# Altium PCB PCB2.PcbDoc (part 6 of 7)
Units mm, origin at the board's own origin, x right, y up, seen from the top; angles counter-clockwise.
Board outline 49 x 45 mm, 6 copper layers (Component Side, GND1, 3.3V, 1.2V, GND2, Solder Side), stack 1.629 mm thick; 56 components, 116 nets, 925 pads, 478 vias.
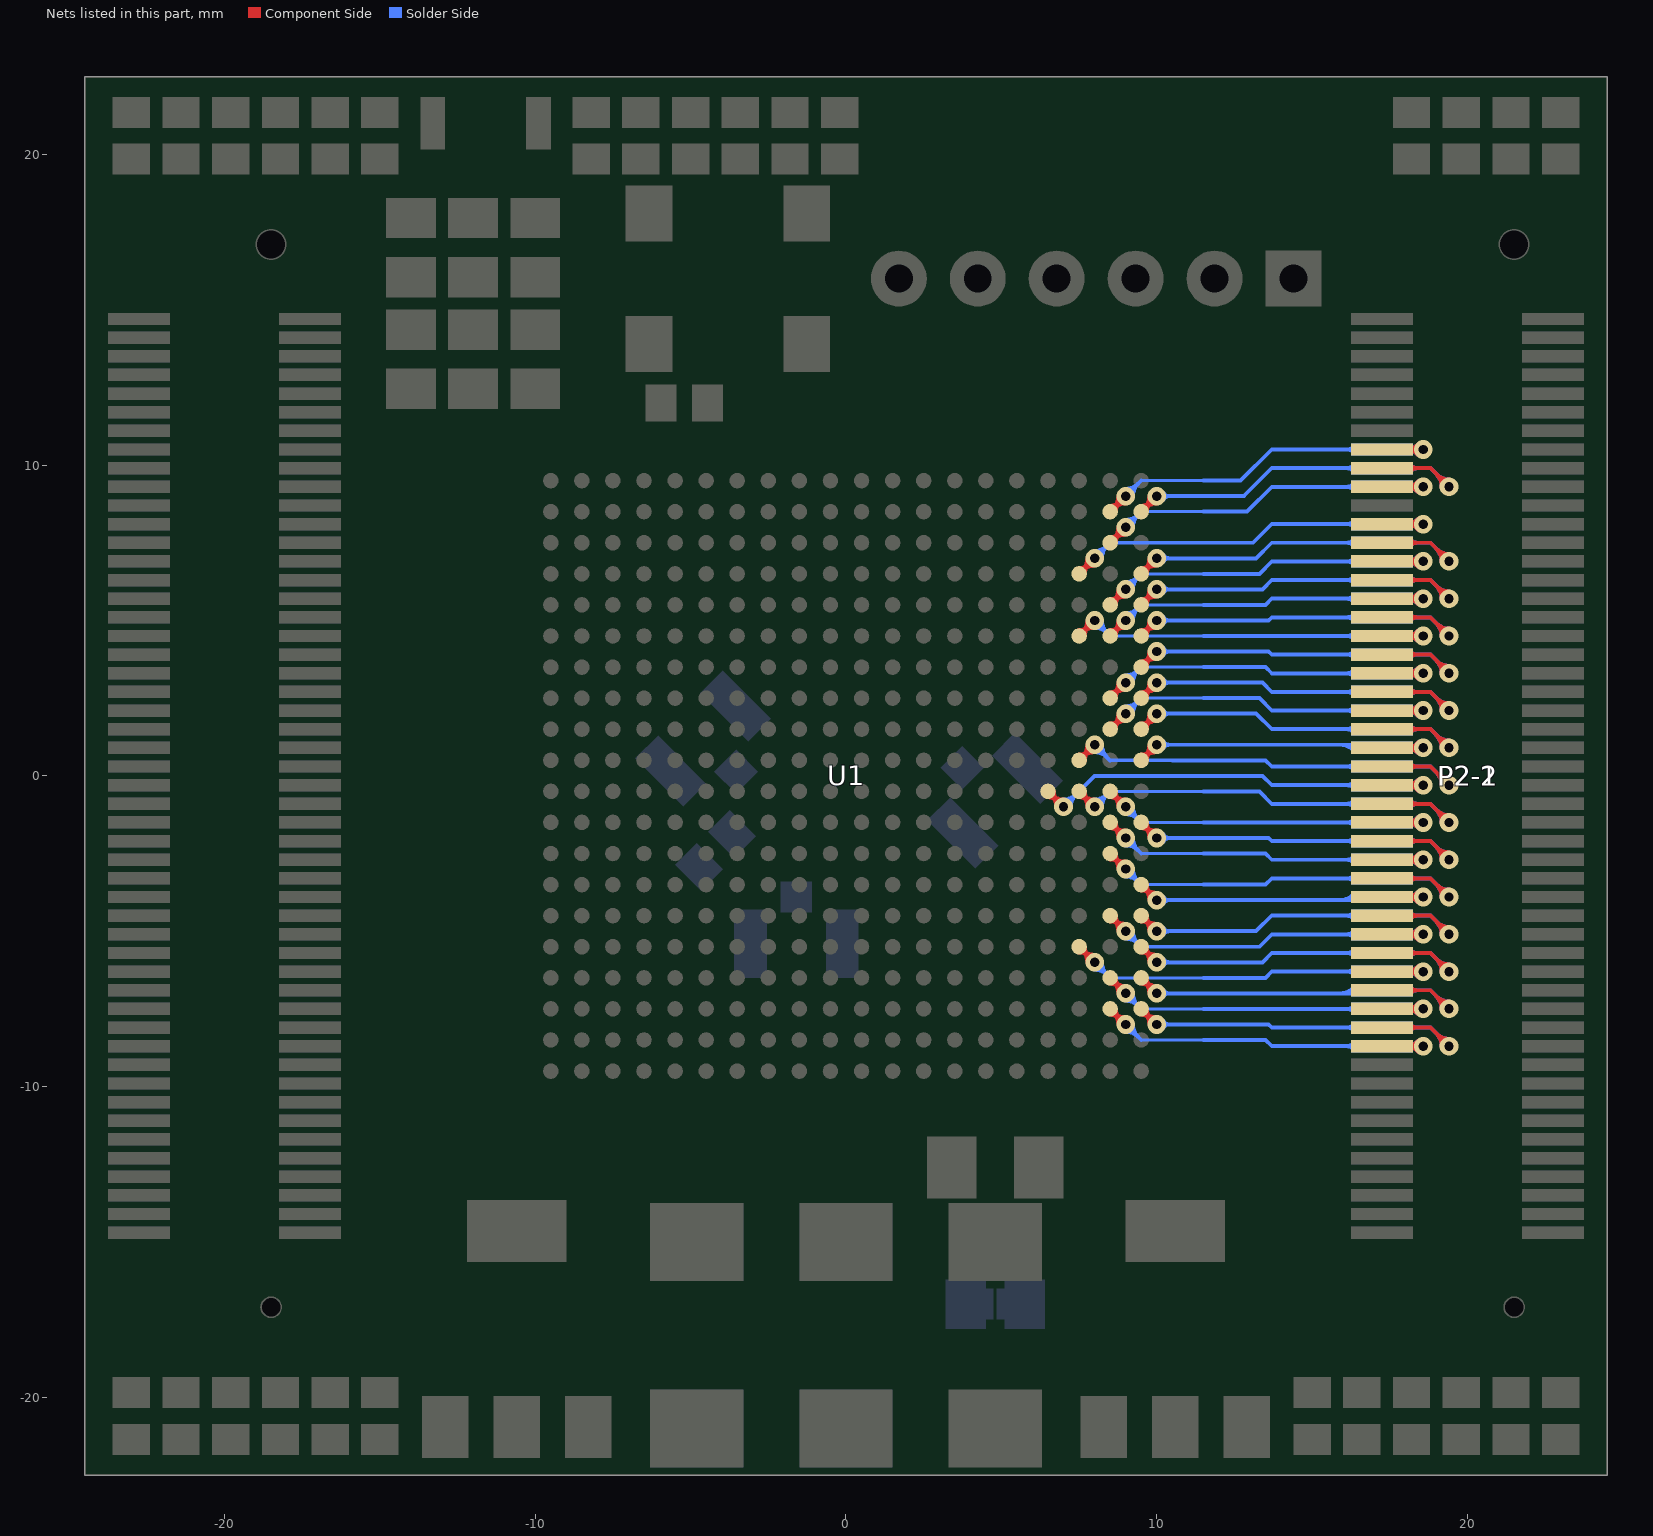
[diagram p10: the nets of this part, all layers, seen from the top]

## Via types
v1: diameter 0.6, hole 0.3, Component Side to Solder Side, tented both sides, 462 vias
v2: diameter 1.5, hole 0.8, Component Side to Solder Side, 10 vias
v3: diameter 1.2, hole 0.6, Component Side to Solder Side, 6 vias

## Nets (pads, with @x,y where several pads share a name; then routed paths per layer and width w, separated by ;. In a path a pad name is that pad's centre, name@x,y a point inside that pad or via, vN(x,y) a via of type N, cw(c..) or ccw(c..) an arc to the next point about the centre after c; other vN are vias at no path point) (continued)
P2-15: P2-1.15 P2-2.15 U1.B19 | length 23.3
  Component Side w0.127: U1.B19@8.5,8.5 v1(9,9) ; P2-1.15@17.25,10.5 v1(18.577,10.5) v1@18.677,10.5 ; U1.B19@8.596,8.596 ccw(c8.193,9) 8.764,9 cw(c8.193,9) U1.B19@8.596,8.596 ; U1.B19@8.596,8.596 cw(c9,8.193) 9,8.764 ccw(c9,8.193) U1.B19@8.596,8.596 ; v1@8.818,8.818 ccw(c9.137,8.5) 8.687,8.5 cw(c9.137,8.5) v1@8.818,8.818 ; v1@8.818,8.818 cw(c8.5,9.137) 8.5,8.686 ccw(c8.5,9.137) v1@8.818,8.818 ; P2-1.15@18.006,10.5 ccw(c18.006,11.071) 18.41,10.667 cw(c18.006,11.071) P2-1.15@18.006,10.5 ; P2-1.15@18.006,10.5 cw(c18.006,9.929) 18.41,10.333 ccw(c18.006,9.929) P2-1.15@18.006,10.5 ; v1@18.38,10.5 ccw(c18.38,10.17) 18.147,10.403 cw(c18.38,10.17) v1@18.38,10.5 ; v1@18.38,10.5 cw(c18.38,10.83) 18.147,10.597 ccw(c18.38,10.83) v1@18.38,10.5
  Solder Side w0.1: 9.5,9.5 10.385,9.5 11.5,9.5
  Solder Side w0.127: v1(9,9) 9.5,9.5 ; 11.5,9.5 12.7,9.5 13.7,10.5 P2-2.15@16.4,10.5 ; P2-2.15@17.25,10.5 v1(18.577,10.5) v1@18.677,10.5 ; 9.404,9.404 ccw(c9.808,9) 9.237,9 cw(c9.808,9) 9.404,9.404 ; 9.404,9.404 cw(c9,9.807) 9,9.237 ccw(c9,9.807) 9.404,9.404 ; 16.12,10.5 ccw(c16.12,10.83) 16.353,10.597 cw(c16.12,10.83) 16.12,10.5 ; 16.12,10.5 cw(c16.12,10.17) 16.353,10.403 ccw(c16.12,10.17) 16.12,10.5 ; P2-2.15@18.006,10.5 ccw(c18.006,11.071) 18.41,10.667 cw(c18.006,11.071) P2-2.15@18.006,10.5 ; P2-2.15@18.006,10.5 cw(c18.006,9.929) 18.41,10.333 ccw(c18.006,9.929) P2-2.15@18.006,10.5 ; v1@18.38,10.5 ccw(c18.38,10.17) 18.147,10.403 cw(c18.38,10.17) v1@18.38,10.5 ; v1@18.38,10.5 cw(c18.38,10.83) 18.147,10.597 ccw(c18.38,10.83) v1@18.38,10.5
P2-17: P2-1.17 P2-2.17 U1.B20 | length 23.9
  Component Side w0.127: U1.B20@9.5,8.5 v1(10,9) ; P2-1.17@17.25,9.9 18.804,9.9 v1(19.404,9.3) ; U1.B20@9.596,8.596 ccw(c9.193,9) 9.764,9 cw(c9.193,9) U1.B20@9.596,8.596 ; U1.B20@9.596,8.596 cw(c10,8.193) 10,8.764 ccw(c10,8.193) U1.B20@9.596,8.596 ; v1@9.818,8.818 ccw(c10.137,8.5) 9.687,8.5 cw(c10.137,8.5) v1@9.818,8.818 ; v1@9.818,8.818 cw(c9.5,9.137) 9.5,8.686 ccw(c9.5,9.137) v1@9.818,8.818 ; 18.38,9.9 ccw(c18.38,9.57) 18.147,9.803 cw(c18.38,9.57) 18.38,9.9 ; 18.38,9.9 cw(c18.38,10.23) 18.147,9.997 ccw(c18.38,10.23) 18.38,9.9 ; 19,9.704 ccw(c19.404,10.107) 19.404,9.536 cw(c19.404,10.107) 19,9.704 ; 19,9.704 cw(c18.597,9.3) 19.168,9.3 ccw(c18.597,9.3) 19,9.704
  Solder Side w0.127: v1(10,9) 10.385,9 ; P2-2.17@17.2,9.9 P2-2.17@17.25,9.9 ; v1(19.404,9.3) 18.804,9.9 P2-2.17@17.25,9.9 ; 10.385,9 ccw(c10.385,8.805) 10.211,8.893 cw(c10.385,8.805) 10.385,9 ; 10.385,9 cw(c10.385,9.195) 10.211,9.107 ccw(c10.385,9.195) 10.385,9 ; 10.385,9 11.5,9 12.8,9 13.7,9.9 P2-2.17@17.25,9.9 ; 16.12,9.9 ccw(c16.12,10.23) 16.353,9.997 cw(c16.12,10.23) 16.12,9.9 ; 16.12,9.9 cw(c16.12,9.57) 16.353,9.803 ccw(c16.12,9.57) 16.12,9.9 ; 18.38,9.9 ccw(c18.38,9.57) 18.147,9.803 cw(c18.38,9.57) 18.38,9.9 ; 18.38,9.9 cw(c18.38,10.23) 18.147,9.997 ccw(c18.38,10.23) 18.38,9.9 ; 19,9.704 ccw(c19.404,10.107) 19.404,9.536 cw(c19.404,10.107) 19,9.704 ; 19,9.704 cw(c18.597,9.3) 19.168,9.3 ccw(c18.597,9.3) 19,9.704
P2-19: P2-1.19 P2-2.19 U1.C19 | length 24
  Component Side w0.127: U1.C19@8.5,7.5 v1(9,8) ; P2-1.19@17.25,9.3 v1(18.577,9.3) v1@18.677,9.3 ; U1.C19@8.596,7.596 ccw(c8.193,8) 8.764,8 cw(c8.193,8) U1.C19@8.596,7.596 ; U1.C19@8.596,7.596 cw(c9,7.193) 9,7.764 ccw(c9,7.193) U1.C19@8.596,7.596 ; v1@8.818,7.818 ccw(c9.137,7.5) 8.687,7.5 cw(c9.137,7.5) v1@8.818,7.818 ; v1@8.818,7.818 cw(c8.5,8.137) 8.5,7.686 ccw(c8.5,8.137) v1@8.818,7.818 ; P2-1.19@18.006,9.3 ccw(c18.006,9.871) 18.41,9.467 cw(c18.006,9.871) P2-1.19@18.006,9.3 ; P2-1.19@18.006,9.3 cw(c18.006,8.729) 18.41,9.133 ccw(c18.006,8.729) P2-1.19@18.006,9.3 ; v1@18.38,9.3 ccw(c18.38,8.97) 18.147,9.203 cw(c18.38,8.97) v1@18.38,9.3 ; v1@18.38,9.3 cw(c18.38,9.63) 18.147,9.397 ccw(c18.38,9.63) v1@18.38,9.3
  Solder Side w0.1: 9.5,8.5 10.385,8.5 11.5,8.5
  Solder Side w0.127: v1(9,8) 9.5,8.5 ; 11.5,8.5 12.9,8.5 13.7,9.3 P2-2.19@17.25,9.3 v1(18.577,9.3) v1@18.677,9.3 ; 9.404,8.404 ccw(c9.808,8) 9.237,8 cw(c9.808,8) 9.404,8.404 ; 9.404,8.404 cw(c9,8.807) 9,8.237 ccw(c9,8.807) 9.404,8.404 ; 16.12,9.3 ccw(c16.12,9.63) 16.353,9.397 cw(c16.12,9.63) 16.12,9.3 ; 16.12,9.3 cw(c16.12,8.97) 16.353,9.203 ccw(c16.12,8.97) 16.12,9.3 ; P2-2.19@18.006,9.3 ccw(c18.006,9.871) 18.41,9.467 cw(c18.006,9.871) P2-2.19@18.006,9.3 ; P2-2.19@18.006,9.3 cw(c18.006,8.729) 18.41,9.133 ccw(c18.006,8.729) P2-2.19@18.006,9.3 ; v1@18.38,9.3 ccw(c18.38,8.97) 18.147,9.203 cw(c18.38,8.97) v1@18.38,9.3 ; v1@18.38,9.3 cw(c18.38,9.63) 18.147,9.397 ccw(c18.38,9.63) v1@18.38,9.3
P2-23: P2-1.23 P2-2.23 U1.D18 | length 25
  Component Side w0.127: U1.D18@7.5,6.5 v1(8,7) ; P2-1.23@17.25,8.1 v1(18.577,8.1) v1@18.677,8.1 ; U1.D18@7.596,6.596 ccw(c7.193,7) 7.764,7 cw(c7.193,7) U1.D18@7.596,6.596 ; U1.D18@7.596,6.596 cw(c8,6.193) 8,6.764 ccw(c8,6.193) U1.D18@7.596,6.596 ; v1@7.818,6.818 ccw(c8.137,6.5) 7.687,6.5 cw(c8.137,6.5) v1@7.818,6.818 ; v1@7.818,6.818 cw(c7.5,7.137) 7.5,6.686 ccw(c7.5,7.137) v1@7.818,6.818 ; P2-1.23@18.006,8.1 ccw(c18.006,8.671) 18.41,8.267 cw(c18.006,8.671) P2-1.23@18.006,8.1 ; P2-1.23@18.006,8.1 cw(c18.006,7.529) 18.41,7.933 ccw(c18.006,7.529) P2-1.23@18.006,8.1 ; v1@18.38,8.1 ccw(c18.38,7.77) 18.147,8.003 cw(c18.38,7.77) v1@18.38,8.1 ; v1@18.38,8.1 cw(c18.38,8.43) 18.147,8.197 ccw(c18.38,8.43) v1@18.38,8.1
  Solder Side w0.1: 8.5,7.5 10.385,7.5 11.5,7.5
  Solder Side w0.127: v1(8,7) 8.5,7.5 ; 11.5,7.5 13.1,7.5 13.7,8.1 P2-2.23@17.25,8.1 v1(18.577,8.1) v1@18.677,8.1 ; 8.404,7.404 ccw(c8.808,7) 8.237,7 cw(c8.808,7) 8.404,7.404 ; 8.404,7.404 cw(c8,7.807) 8,7.237 ccw(c8,7.807) 8.404,7.404 ; 16.12,8.1 ccw(c16.12,8.43) 16.353,8.197 cw(c16.12,8.43) 16.12,8.1 ; 16.12,8.1 cw(c16.12,7.77) 16.353,8.003 ccw(c16.12,7.77) 16.12,8.1 ; P2-2.23@18.006,8.1 ccw(c18.006,8.671) 18.41,8.267 cw(c18.006,8.671) P2-2.23@18.006,8.1 ; P2-2.23@18.006,8.1 cw(c18.006,7.529) 18.41,7.933 ccw(c18.006,7.529) P2-2.23@18.006,8.1 ; v1@18.38,8.1 ccw(c18.38,7.77) 18.147,8.003 cw(c18.38,7.77) v1@18.38,8.1 ; v1@18.38,8.1 cw(c18.38,8.43) 18.147,8.197 ccw(c18.38,8.43) v1@18.38,8.1
P2-25: P2-1.25 P2-2.25 U1.D20 | length 23.8
  Component Side w0.127: U1.D20@9.5,6.5 v1(10,7) ; P2-1.25@17.25,7.5 18.804,7.5 v1(19.404,6.9) ; U1.D20@9.596,6.596 ccw(c9.193,7) 9.764,7 cw(c9.193,7) U1.D20@9.596,6.596 ; U1.D20@9.596,6.596 cw(c10,6.193) 10,6.764 ccw(c10,6.193) U1.D20@9.596,6.596 ; v1@9.818,6.818 ccw(c10.137,6.5) 9.687,6.5 cw(c10.137,6.5) v1@9.818,6.818 ; v1@9.818,6.818 cw(c9.5,7.137) 9.5,6.686 ccw(c9.5,7.137) v1@9.818,6.818 ; 18.38,7.5 ccw(c18.38,7.17) 18.147,7.403 cw(c18.38,7.17) 18.38,7.5 ; 18.38,7.5 cw(c18.38,7.83) 18.147,7.597 ccw(c18.38,7.83) 18.38,7.5 ; 19,7.304 ccw(c19.404,7.707) 19.404,7.136 cw(c19.404,7.707) 19,7.304 ; 19,7.304 cw(c18.597,6.9) 19.168,6.9 ccw(c18.597,6.9) 19,7.304
  Solder Side w0.127: v1(10,7) 10.385,7 ; P2-2.25@17.2,7.5 P2-2.25@17.25,7.5 ; v1(19.404,6.9) 18.804,7.5 P2-2.25@17.25,7.5 ; 10.385,7 ccw(c10.385,6.805) 10.211,6.893 cw(c10.385,6.805) 10.385,7 ; 10.385,7 cw(c10.385,7.195) 10.211,7.107 ccw(c10.385,7.195) 10.385,7 ; 10.385,7 11.5,7 13.2,7 13.7,7.5 P2-2.25@17.25,7.5 ; 16.12,7.5 ccw(c16.12,7.83) 16.353,7.597 cw(c16.12,7.83) 16.12,7.5 ; 16.12,7.5 cw(c16.12,7.17) 16.353,7.403 ccw(c16.12,7.17) 16.12,7.5 ; 18.38,7.5 ccw(c18.38,7.17) 18.147,7.403 cw(c18.38,7.17) 18.38,7.5 ; 18.38,7.5 cw(c18.38,7.83) 18.147,7.597 ccw(c18.38,7.83) 18.38,7.5 ; 19,7.304 ccw(c19.404,7.707) 19.404,7.136 cw(c19.404,7.707) 19,7.304 ; 19,7.304 cw(c18.597,6.9) 19.168,6.9 ccw(c18.597,6.9) 19,7.304
P2-27: P2-1.27 P2-2.27 U1.E19 | length 23.9
  Component Side w0.127: U1.E19@8.5,5.5 v1(9,6) ; P2-1.27@17.25,6.9 v1(18.577,6.9) v1@18.677,6.9 ; U1.E19@8.596,5.596 ccw(c8.193,6) 8.764,6 cw(c8.193,6) U1.E19@8.596,5.596 ; U1.E19@8.596,5.596 cw(c9,5.193) 9,5.764 ccw(c9,5.193) U1.E19@8.596,5.596 ; v1@8.818,5.818 ccw(c9.137,5.5) 8.687,5.5 cw(c9.137,5.5) v1@8.818,5.818 ; v1@8.818,5.818 cw(c8.5,6.137) 8.5,5.686 ccw(c8.5,6.137) v1@8.818,5.818 ; P2-1.27@18.006,6.9 ccw(c18.006,7.471) 18.41,7.067 cw(c18.006,7.471) P2-1.27@18.006,6.9 ; P2-1.27@18.006,6.9 cw(c18.006,6.329) 18.41,6.733 ccw(c18.006,6.329) P2-1.27@18.006,6.9 ; v1@18.38,6.9 ccw(c18.38,6.57) 18.147,6.803 cw(c18.38,6.57) v1@18.38,6.9 ; v1@18.38,6.9 cw(c18.38,7.23) 18.147,6.997 ccw(c18.38,7.23) v1@18.38,6.9
  Solder Side w0.1: 9.5,6.5 10.385,6.5 11.5,6.5
  Solder Side w0.127: v1(9,6) 9.5,6.5 ; 11.5,6.5 13.3,6.5 13.7,6.9 P2-2.27@17.25,6.9 v1(18.577,6.9) v1@18.677,6.9 ; 9.404,6.404 ccw(c9.808,6) 9.237,6 cw(c9.808,6) 9.404,6.404 ; 9.404,6.404 cw(c9,6.807) 9,6.237 ccw(c9,6.807) 9.404,6.404 ; 16.12,6.9 ccw(c16.12,7.23) 16.353,6.997 cw(c16.12,7.23) 16.12,6.9 ; 16.12,6.9 cw(c16.12,6.57) 16.353,6.803 ccw(c16.12,6.57) 16.12,6.9 ; P2-2.27@18.006,6.9 ccw(c18.006,7.471) 18.41,7.067 cw(c18.006,7.471) P2-2.27@18.006,6.9 ; P2-2.27@18.006,6.9 cw(c18.006,6.329) 18.41,6.733 ccw(c18.006,6.329) P2-2.27@18.006,6.9 ; v1@18.38,6.9 ccw(c18.38,6.57) 18.147,6.803 cw(c18.38,6.57) v1@18.38,6.9 ; v1@18.38,6.9 cw(c18.38,7.23) 18.147,6.997 ccw(c18.38,7.23) v1@18.38,6.9
P2-29: P2-1.29 P2-2.29 U1.E20 | length 23.6
  Component Side w0.127: U1.E20@9.5,5.5 v1(10,6) ; P2-1.29@17.25,6.3 18.804,6.3 v1(19.404,5.7) ; U1.E20@9.596,5.596 ccw(c9.193,6) 9.764,6 cw(c9.193,6) U1.E20@9.596,5.596 ; U1.E20@9.596,5.596 cw(c10,5.193) 10,5.764 ccw(c10,5.193) U1.E20@9.596,5.596 ; v1@9.818,5.818 ccw(c10.137,5.5) 9.687,5.5 cw(c10.137,5.5) v1@9.818,5.818 ; v1@9.818,5.818 cw(c9.5,6.137) 9.5,5.686 ccw(c9.5,6.137) v1@9.818,5.818 ; 18.38,6.3 ccw(c18.38,5.97) 18.147,6.203 cw(c18.38,5.97) 18.38,6.3 ; 18.38,6.3 cw(c18.38,6.63) 18.147,6.397 ccw(c18.38,6.63) 18.38,6.3 ; 19,6.104 ccw(c19.404,6.507) 19.404,5.936 cw(c19.404,6.507) 19,6.104 ; 19,6.104 cw(c18.597,5.7) 19.168,5.7 ccw(c18.597,5.7) 19,6.104
  Solder Side w0.127: v1(10,6) 10.385,6 ; v1(19.404,5.7) 18.804,6.3 P2-2.29@17.25,6.3 13.7,6.3 13.4,6 11.5,6 10.385,6 ; 10.385,6 ccw(c10.385,5.805) 10.211,5.893 cw(c10.385,5.805) 10.385,6 ; 10.385,6 cw(c10.385,6.195) 10.211,6.107 ccw(c10.385,6.195) 10.385,6 ; 16.12,6.3 ccw(c16.12,6.63) 16.353,6.397 cw(c16.12,6.63) 16.12,6.3 ; 16.12,6.3 cw(c16.12,5.97) 16.353,6.203 ccw(c16.12,5.97) 16.12,6.3 ; 18.38,6.3 ccw(c18.38,5.97) 18.147,6.203 cw(c18.38,5.97) 18.38,6.3 ; 18.38,6.3 cw(c18.38,6.63) 18.147,6.397 ccw(c18.38,6.63) 18.38,6.3 ; 19,6.104 ccw(c19.404,6.507) 19.404,5.936 cw(c19.404,6.507) 19,6.104 ; 19,6.104 cw(c18.597,5.7) 19.168,5.7 ccw(c18.597,5.7) 19,6.104
P2-31: P2-1.31 P2-2.31 U1.F19 | length 23.8
  Component Side w0.127: U1.F19@8.5,4.5 v1(9,5) ; P2-1.31@17.25,5.7 v1(18.577,5.7) v1@18.677,5.7 ; U1.F19@8.596,4.596 ccw(c8.193,5) 8.764,5 cw(c8.193,5) U1.F19@8.596,4.596 ; U1.F19@8.596,4.596 cw(c9,4.193) 9,4.764 ccw(c9,4.193) U1.F19@8.596,4.596 ; v1@8.818,4.818 ccw(c9.137,4.5) 8.687,4.5 cw(c9.137,4.5) v1@8.818,4.818 ; v1@8.818,4.818 cw(c8.5,5.137) 8.5,4.686 ccw(c8.5,5.137) v1@8.818,4.818 ; P2-1.31@18.006,5.7 ccw(c18.006,6.271) 18.41,5.867 cw(c18.006,6.271) P2-1.31@18.006,5.7 ; P2-1.31@18.006,5.7 cw(c18.006,5.129) 18.41,5.533 ccw(c18.006,5.129) P2-1.31@18.006,5.7 ; v1@18.38,5.7 ccw(c18.38,5.37) 18.147,5.603 cw(c18.38,5.37) v1@18.38,5.7 ; v1@18.38,5.7 cw(c18.38,6.03) 18.147,5.797 ccw(c18.38,6.03) v1@18.38,5.7
  Solder Side w0.1: 9.5,5.5 10.385,5.5 11.5,5.5
  Solder Side w0.127: v1(9,5) 9.5,5.5 ; 11.5,5.5 13.5,5.5 13.7,5.7 P2-2.31@17.25,5.7 v1(18.577,5.7) v1@18.677,5.7 ; 9.404,5.404 ccw(c9.808,5) 9.237,5 cw(c9.808,5) 9.404,5.404 ; 9.404,5.404 cw(c9,5.807) 9,5.237 ccw(c9,5.807) 9.404,5.404 ; 16.12,5.7 ccw(c16.12,6.03) 16.353,5.797 cw(c16.12,6.03) 16.12,5.7 ; 16.12,5.7 cw(c16.12,5.37) 16.353,5.603 ccw(c16.12,5.37) 16.12,5.7 ; P2-2.31@18.006,5.7 ccw(c18.006,6.271) 18.41,5.867 cw(c18.006,6.271) P2-2.31@18.006,5.7 ; P2-2.31@18.006,5.7 cw(c18.006,5.129) 18.41,5.533 ccw(c18.006,5.129) P2-2.31@18.006,5.7 ; v1@18.38,5.7 ccw(c18.38,5.37) 18.147,5.603 cw(c18.38,5.37) v1@18.38,5.7 ; v1@18.38,5.7 cw(c18.38,6.03) 18.147,5.797 ccw(c18.38,6.03) v1@18.38,5.7
P2-33: P2-1.33 P2-2.33 U1.F20 | length 23.6
  Component Side w0.127: U1.F20@9.5,4.5 v1(10,5) ; P2-1.33@17.25,5.1 18.804,5.1 v1(19.404,4.5) ; U1.F20@9.596,4.596 ccw(c9.193,5) 9.764,5 cw(c9.193,5) U1.F20@9.596,4.596 ; U1.F20@9.596,4.596 cw(c10,4.193) 10,4.764 ccw(c10,4.193) U1.F20@9.596,4.596 ; v1@9.818,4.818 ccw(c10.137,4.5) 9.687,4.5 cw(c10.137,4.5) v1@9.818,4.818 ; v1@9.818,4.818 cw(c9.5,5.137) 9.5,4.686 ccw(c9.5,5.137) v1@9.818,4.818 ; 18.38,5.1 ccw(c18.38,4.77) 18.147,5.003 cw(c18.38,4.77) 18.38,5.1 ; 18.38,5.1 cw(c18.38,5.43) 18.147,5.197 ccw(c18.38,5.43) 18.38,5.1 ; 19,4.904 ccw(c19.404,5.307) 19.404,4.736 cw(c19.404,5.307) 19,4.904 ; 19,4.904 cw(c18.597,4.5) 19.168,4.5 ccw(c18.597,4.5) 19,4.904
  Solder Side w0.127: v1(10,5) 10.385,5 ; v1(19.404,4.5) 18.804,5.1 P2-2.33@17.25,5.1 13.7,5.1 13.6,5 11.5,5 10.385,5 ; 10.385,5 ccw(c10.385,4.805) 10.211,4.893 cw(c10.385,4.805) 10.385,5 ; 10.385,5 cw(c10.385,5.195) 10.211,5.107 ccw(c10.385,5.195) 10.385,5 ; 16.12,5.1 ccw(c16.12,5.43) 16.353,5.197 cw(c16.12,5.43) 16.12,5.1 ; 16.12,5.1 cw(c16.12,4.77) 16.353,5.003 ccw(c16.12,4.77) 16.12,5.1 ; 18.38,5.1 ccw(c18.38,4.77) 18.147,5.003 cw(c18.38,4.77) 18.38,5.1 ; 18.38,5.1 cw(c18.38,5.43) 18.147,5.197 ccw(c18.38,5.43) 18.38,5.1 ; 19,4.904 ccw(c19.404,5.307) 19.404,4.736 cw(c19.404,5.307) 19,4.904 ; 19,4.904 cw(c18.597,4.5) 19.168,4.5 ccw(c18.597,4.5) 19,4.904
P2-35: P2-1.35 P2-2.35 U1.F18 | length 24.7
  Component Side w0.127: U1.F18@7.5,4.5 v1(8,5) ; P2-1.35@17.25,4.5 v1(18.577,4.5) v1@18.677,4.5 ; U1.F18@7.596,4.596 ccw(c7.193,5) 7.764,5 cw(c7.193,5) U1.F18@7.596,4.596 ; U1.F18@7.596,4.596 cw(c8,4.193) 8,4.764 ccw(c8,4.193) U1.F18@7.596,4.596 ; v1@7.818,4.818 ccw(c8.137,4.5) 7.687,4.5 cw(c8.137,4.5) v1@7.818,4.818 ; v1@7.818,4.818 cw(c7.5,5.137) 7.5,4.686 ccw(c7.5,5.137) v1@7.818,4.818 ; P2-1.35@18.006,4.5 ccw(c18.006,5.071) 18.41,4.667 cw(c18.006,5.071) P2-1.35@18.006,4.5 ; P2-1.35@18.006,4.5 cw(c18.006,3.929) 18.41,4.333 ccw(c18.006,3.929) P2-1.35@18.006,4.5 ; v1@18.38,4.5 ccw(c18.38,4.17) 18.147,4.403 cw(c18.38,4.17) v1@18.38,4.5 ; v1@18.38,4.5 cw(c18.38,4.83) 18.147,4.597 ccw(c18.38,4.83) v1@18.38,4.5
  Solder Side w0.1: 8.5,4.5 10.5,4.5 11.5,4.5
  Solder Side w0.127: v1(8,5) 8.5,4.5 ; 11.5,4.5 P2-2.35@17.25,4.5 v1(18.577,4.5) v1@18.677,4.5 ; 8.404,4.596 ccw(c8,4.193) 8,4.764 cw(c8,4.193) 8.404,4.596 ; 8.404,4.596 cw(c8.808,5) 8.237,5 ccw(c8.808,5) 8.404,4.596 ; 16.12,4.5 ccw(c16.12,4.83) 16.353,4.597 cw(c16.12,4.83) 16.12,4.5 ; 16.12,4.5 cw(c16.12,4.17) 16.353,4.403 ccw(c16.12,4.17) 16.12,4.5 ; P2-2.35@18.006,4.5 ccw(c18.006,5.071) 18.41,4.667 cw(c18.006,5.071) P2-2.35@18.006,4.5 ; P2-2.35@18.006,4.5 cw(c18.006,3.929) 18.41,4.333 ccw(c18.006,3.929) P2-2.35@18.006,4.5 ; v1@18.38,4.5 ccw(c18.38,4.17) 18.147,4.403 cw(c18.38,4.17) v1@18.38,4.5 ; v1@18.38,4.5 cw(c18.38,4.83) 18.147,4.597 ccw(c18.38,4.83) v1@18.38,4.5
P2-37: P2-1.37 P2-2.37 U1.G20 | length 23.6
  Component Side w0.127: U1.G20@9.5,3.5 v1(10,4) ; P2-1.37@17.25,3.9 18.804,3.9 v1(19.404,3.3) ; U1.G20@9.596,3.596 ccw(c9.193,4) 9.764,4 cw(c9.193,4) U1.G20@9.596,3.596 ; U1.G20@9.596,3.596 cw(c10,3.193) 10,3.764 ccw(c10,3.193) U1.G20@9.596,3.596 ; v1@9.818,3.818 ccw(c10.137,3.5) 9.687,3.5 cw(c10.137,3.5) v1@9.818,3.818 ; v1@9.818,3.818 cw(c9.5,4.137) 9.5,3.686 ccw(c9.5,4.137) v1@9.818,3.818 ; 18.38,3.9 ccw(c18.38,3.57) 18.147,3.803 cw(c18.38,3.57) 18.38,3.9 ; 18.38,3.9 cw(c18.38,4.23) 18.147,3.997 ccw(c18.38,4.23) 18.38,3.9 ; 19,3.704 ccw(c19.404,4.107) 19.404,3.536 cw(c19.404,4.107) 19,3.704 ; 19,3.704 cw(c18.597,3.3) 19.168,3.3 ccw(c18.597,3.3) 19,3.704
  Solder Side w0.127: v1(10,4) 10.385,4 ; v1(19.404,3.3) 18.804,3.9 P2-2.37@17.25,3.9 13.7,3.9 13.6,4 11.5,4 10.385,4 ; 10.385,4 ccw(c10.385,3.805) 10.211,3.893 cw(c10.385,3.805) 10.385,4 ; 10.385,4 cw(c10.385,4.195) 10.211,4.107 ccw(c10.385,4.195) 10.385,4 ; 16.12,3.9 ccw(c16.12,4.23) 16.353,3.997 cw(c16.12,4.23) 16.12,3.9 ; 16.12,3.9 cw(c16.12,3.57) 16.353,3.803 ccw(c16.12,3.57) 16.12,3.9 ; 18.38,3.9 ccw(c18.38,3.57) 18.147,3.803 cw(c18.38,3.57) 18.38,3.9 ; 18.38,3.9 cw(c18.38,4.23) 18.147,3.997 ccw(c18.38,4.23) 18.38,3.9 ; 19,3.704 ccw(c19.404,4.107) 19.404,3.536 cw(c19.404,4.107) 19,3.704 ; 19,3.704 cw(c18.597,3.3) 19.168,3.3 ccw(c18.597,3.3) 19,3.704
P2-39: P2-1.39 P2-2.39 U1.H19 | length 23.8
  Component Side w0.127: U1.H19@8.5,2.5 v1(9,3) ; P2-1.39@17.25,3.3 v1(18.577,3.3) v1@18.677,3.3 ; U1.H19@8.596,2.596 ccw(c8.193,3) 8.764,3 cw(c8.193,3) U1.H19@8.596,2.596 ; U1.H19@8.596,2.596 cw(c9,2.193) 9,2.764 ccw(c9,2.193) U1.H19@8.596,2.596 ; v1@8.818,2.818 ccw(c9.137,2.5) 8.687,2.5 cw(c9.137,2.5) v1@8.818,2.818 ; v1@8.818,2.818 cw(c8.5,3.137) 8.5,2.686 ccw(c8.5,3.137) v1@8.818,2.818 ; P2-1.39@18.006,3.3 ccw(c18.006,3.871) 18.41,3.467 cw(c18.006,3.871) P2-1.39@18.006,3.3 ; P2-1.39@18.006,3.3 cw(c18.006,2.729) 18.41,3.133 ccw(c18.006,2.729) P2-1.39@18.006,3.3 ; v1@18.38,3.3 ccw(c18.38,2.97) 18.147,3.203 cw(c18.38,2.97) v1@18.38,3.3 ; v1@18.38,3.3 cw(c18.38,3.63) 18.147,3.397 ccw(c18.38,3.63) v1@18.38,3.3
  Solder Side w0.1: 9.5,3.5 10.385,3.5 11.5,3.5
  Solder Side w0.127: v1(9,3) 9.5,3.5 ; 11.5,3.5 13.5,3.5 13.7,3.3 P2-2.39@17.25,3.3 v1(18.577,3.3) v1@18.677,3.3 ; 9.404,3.404 ccw(c9.808,3) 9.237,3 cw(c9.808,3) 9.404,3.404 ; 9.404,3.404 cw(c9,3.807) 9,3.237 ccw(c9,3.807) 9.404,3.404 ; 16.12,3.3 ccw(c16.12,3.63) 16.353,3.397 cw(c16.12,3.63) 16.12,3.3 ; 16.12,3.3 cw(c16.12,2.97) 16.353,3.203 ccw(c16.12,2.97) 16.12,3.3 ; P2-2.39@18.006,3.3 ccw(c18.006,3.871) 18.41,3.467 cw(c18.006,3.871) P2-2.39@18.006,3.3 ; P2-2.39@18.006,3.3 cw(c18.006,2.729) 18.41,3.133 ccw(c18.006,2.729) P2-2.39@18.006,3.3 ; v1@18.38,3.3 ccw(c18.38,2.97) 18.147,3.203 cw(c18.38,2.97) v1@18.38,3.3 ; v1@18.38,3.3 cw(c18.38,3.63) 18.147,3.397 ccw(c18.38,3.63) v1@18.38,3.3
P2-41: P2-1.41 P2-2.41 U1.H20 | length 23.7
  Component Side w0.127: U1.H20@9.5,2.5 v1(10,3) ; P2-1.41@17.25,2.7 18.804,2.7 v1(19.404,2.1) ; U1.H20@9.596,2.596 ccw(c9.193,3) 9.764,3 cw(c9.193,3) U1.H20@9.596,2.596 ; U1.H20@9.596,2.596 cw(c10,2.193) 10,2.764 ccw(c10,2.193) U1.H20@9.596,2.596 ; v1@9.818,2.818 ccw(c10.137,2.5) 9.687,2.5 cw(c10.137,2.5) v1@9.818,2.818 ; v1@9.818,2.818 cw(c9.5,3.137) 9.5,2.686 ccw(c9.5,3.137) v1@9.818,2.818 ; 18.38,2.7 ccw(c18.38,2.37) 18.147,2.603 cw(c18.38,2.37) 18.38,2.7 ; 18.38,2.7 cw(c18.38,3.03) 18.147,2.797 ccw(c18.38,3.03) 18.38,2.7 ; 19,2.504 ccw(c19.404,2.907) 19.404,2.336 cw(c19.404,2.907) 19,2.504 ; 19,2.504 cw(c18.597,2.1) 19.168,2.1 ccw(c18.597,2.1) 19,2.504
  Solder Side w0.127: v1(10,3) 10.385,3 ; P2-2.41@17.2,2.7 P2-2.41@17.25,2.7 ; v1(19.404,2.1) 18.804,2.7 P2-2.41@17.25,2.7 ; 10.385,3 ccw(c10.385,2.805) 10.211,2.893 cw(c10.385,2.805) 10.385,3 ; 10.385,3 cw(c10.385,3.195) 10.211,3.107 ccw(c10.385,3.195) 10.385,3 ; 10.385,3 11.5,3 13.4,3 13.7,2.7 P2-2.41@17.25,2.7 ; 16.12,2.7 ccw(c16.12,3.03) 16.353,2.797 cw(c16.12,3.03) 16.12,2.7 ; 16.12,2.7 cw(c16.12,2.37) 16.353,2.603 ccw(c16.12,2.37) 16.12,2.7 ; 18.38,2.7 ccw(c18.38,2.37) 18.147,2.603 cw(c18.38,2.37) 18.38,2.7 ; 18.38,2.7 cw(c18.38,3.03) 18.147,2.797 ccw(c18.38,3.03) 18.38,2.7 ; 19,2.504 ccw(c19.404,2.907) 19.404,2.336 cw(c19.404,2.907) 19,2.504 ; 19,2.504 cw(c18.597,2.1) 19.168,2.1 ccw(c18.597,2.1) 19,2.504
P2-43: P2-1.43 P2-2.43 U1.J19 | length 23.9
  Component Side w0.127: U1.J19@8.5,1.5 v1(9,2) ; P2-1.43@17.25,2.1 v1(18.577,2.1) v1@18.677,2.1 ; U1.J19@8.596,1.596 ccw(c8.193,2) 8.764,2 cw(c8.193,2) U1.J19@8.596,1.596 ; U1.J19@8.596,1.596 cw(c9,1.193) 9,1.764 ccw(c9,1.193) U1.J19@8.596,1.596 ; v1@8.818,1.818 ccw(c9.137,1.5) 8.687,1.5 cw(c9.137,1.5) v1@8.818,1.818 ; v1@8.818,1.818 cw(c8.5,2.137) 8.5,1.687 ccw(c8.5,2.137) v1@8.818,1.818 ; P2-1.43@18.006,2.1 ccw(c18.006,2.671) 18.41,2.267 cw(c18.006,2.671) P2-1.43@18.006,2.1 ; P2-1.43@18.006,2.1 cw(c18.006,1.529) 18.41,1.933 ccw(c18.006,1.529) P2-1.43@18.006,2.1 ; v1@18.38,2.1 ccw(c18.38,1.77) 18.147,2.003 cw(c18.38,1.77) v1@18.38,2.1 ; v1@18.38,2.1 cw(c18.38,2.43) 18.147,2.197 ccw(c18.38,2.43) v1@18.38,2.1
  Solder Side w0.1: 9.5,2.5 10.385,2.5 11.5,2.5
  Solder Side w0.127: v1(9,2) 9.5,2.5 ; 11.5,2.5 13.3,2.5 13.7,2.1 P2-2.43@17.25,2.1 v1(18.577,2.1) v1@18.677,2.1 ; 9.404,2.404 ccw(c9.808,2) 9.237,2 cw(c9.808,2) 9.404,2.404 ; 9.404,2.404 cw(c9,2.807) 9,2.237 ccw(c9,2.807) 9.404,2.404 ; 16.12,2.1 ccw(c16.12,2.43) 16.353,2.197 cw(c16.12,2.43) 16.12,2.1 ; 16.12,2.1 cw(c16.12,1.77) 16.353,2.003 ccw(c16.12,1.77) 16.12,2.1 ; P2-2.43@18.006,2.1 ccw(c18.006,2.671) 18.41,2.267 cw(c18.006,2.671) P2-2.43@18.006,2.1 ; P2-2.43@18.006,2.1 cw(c18.006,1.529) 18.41,1.933 ccw(c18.006,1.529) P2-2.43@18.006,2.1 ; v1@18.38,2.1 ccw(c18.38,1.77) 18.147,2.003 cw(c18.38,1.77) v1@18.38,2.1 ; v1@18.38,2.1 cw(c18.38,2.43) 18.147,2.197 ccw(c18.38,2.43) v1@18.38,2.1
P2-45: P2-1.45 P2-2.45 U1.J20 | length 23.7
  Component Side w0.127: U1.J20@9.5,1.5 v1(10,2) ; P2-1.45@17.25,1.5 18.804,1.5 v1(19.404,0.9) ; U1.J20@9.596,1.596 ccw(c9.193,2) 9.764,2 cw(c9.193,2) U1.J20@9.596,1.596 ; U1.J20@9.596,1.596 cw(c10,1.193) 10,1.764 ccw(c10,1.193) U1.J20@9.596,1.596 ; v1@9.818,1.818 ccw(c10.137,1.5) 9.687,1.5 cw(c10.137,1.5) v1@9.818,1.818 ; v1@9.818,1.818 cw(c9.5,2.137) 9.5,1.687 ccw(c9.5,2.137) v1@9.818,1.818 ; 18.38,1.5 ccw(c18.38,1.17) 18.147,1.403 cw(c18.38,1.17) 18.38,1.5 ; 18.38,1.5 cw(c18.38,1.83) 18.147,1.597 ccw(c18.38,1.83) 18.38,1.5 ; 19,1.304 ccw(c19.404,1.707) 19.404,1.136 cw(c19.404,1.707) 19,1.304 ; 19,1.304 cw(c18.597,0.9) 19.168,0.9 ccw(c18.597,0.9) 19,1.304
  Solder Side w0.127: v1(10,2) 10.385,2 ; v1(19.404,0.9) 18.804,1.5 P2-2.45@17.25,1.5 13.7,1.5 13.2,2 11.5,2 10.385,2 ; 10.385,2 ccw(c10.385,1.805) 10.211,1.893 cw(c10.385,1.805) 10.385,2 ; 10.385,2 cw(c10.385,2.195) 10.211,2.107 ccw(c10.385,2.195) 10.385,2 ; 16.12,1.5 ccw(c16.12,1.83) 16.353,1.597 cw(c16.12,1.83) 16.12,1.5 ; 16.12,1.5 cw(c16.12,1.17) 16.353,1.403 ccw(c16.12,1.17) 16.12,1.5 ; 18.38,1.5 ccw(c18.38,1.17) 18.147,1.403 cw(c18.38,1.17) 18.38,1.5 ; 18.38,1.5 cw(c18.38,1.83) 18.147,1.597 ccw(c18.38,1.83) 18.38,1.5 ; 19,1.304 ccw(c19.404,1.707) 19.404,1.136 cw(c19.404,1.707) 19,1.304 ; 19,1.304 cw(c18.597,0.9) 19.168,0.9 ccw(c18.597,0.9) 19,1.304
P2-47: P2-1.47 P2-2.47 U1.K20 | length 22.2
  Component Side w0.127: U1.K20@9.5,0.5 v1(10,1) ; P2-1.47@17.25,0.9 v1(18.577,0.9) v1@18.677,0.9 ; U1.K20@9.596,0.596 ccw(c9.193,1) 9.764,1 cw(c9.193,1) U1.K20@9.596,0.596 ; U1.K20@9.596,0.596 cw(c10,0.193) 10,0.764 ccw(c10,0.193) U1.K20@9.596,0.596 ; v1@9.818,0.818 ccw(c10.137,0.5) 9.687,0.5 cw(c10.137,0.5) v1@9.818,0.818 ; v1@9.818,0.818 cw(c9.5,1.137) 9.5,0.687 ccw(c9.5,1.137) v1@9.818,0.818 ; P2-1.47@18.006,0.9 ccw(c18.006,1.471) 18.41,1.067 cw(c18.006,1.471) P2-1.47@18.006,0.9 ; P2-1.47@18.006,0.9 cw(c18.006,0.329) 18.41,0.733 ccw(c18.006,0.329) P2-1.47@18.006,0.9 ; v1@18.38,0.9 ccw(c18.38,0.57) 18.147,0.803 cw(c18.38,0.57) v1@18.38,0.9 ; v1@18.38,0.9 cw(c18.38,1.23) 18.147,0.997 ccw(c18.38,1.23) v1@18.38,0.9
  Solder Side w0.127: v1(10,1) 10.385,1 ; P2-2.47@17.25,0.9 v1(18.577,0.9) v1@18.677,0.9 ; P2-2.47@17.25,1 11.5,1 10.385,1 ; 10.385,1 ccw(c10.385,0.805) 10.211,0.893 cw(c10.385,0.805) 10.385,1 ; 10.385,1 cw(c10.385,1.195) 10.211,1.107 ccw(c10.385,1.195) 10.385,1 ; P2-2.47@18.006,0.9 ccw(c18.006,1.471) 18.41,1.067 cw(c18.006,1.471) P2-2.47@18.006,0.9 ; P2-2.47@18.006,0.9 cw(c18.006,0.329) 18.41,0.733 ccw(c18.006,0.329) P2-2.47@18.006,0.9 ; v1@18.38,0.9 ccw(c18.38,0.57) 18.147,0.803 cw(c18.38,0.57) v1@18.38,0.9 ; v1@18.38,0.9 cw(c18.38,1.23) 18.147,0.997 ccw(c18.38,1.23) v1@18.38,0.9 ; 15.879,1 cw(c15.879,0.329) 16.353,0.803 ccw(c15.879,0.329) 15.879,1 ; 16.186,1 cw(c16.186,0.636) 16.443,0.893 ccw(c16.186,0.636) 16.186,1
P2-49: P2-1.49 P2-2.49 U1.K18 | length 26.8
  Component Side w0.127: U1.K18@7.5,0.5 v1(8,1) ; P2-1.49@17.25,0.3 18.804,0.3 v1(19.404,-0.3) ; U1.K18@7.596,0.596 ccw(c7.193,1) 7.764,1 cw(c7.193,1) U1.K18@7.596,0.596 ; U1.K18@7.596,0.596 cw(c8,0.193) 8,0.764 ccw(c8,0.193) U1.K18@7.596,0.596 ; v1@7.818,0.818 ccw(c8.137,0.5) 7.687,0.5 cw(c8.137,0.5) v1@7.818,0.818 ; v1@7.818,0.818 cw(c7.5,1.137) 7.5,0.687 ccw(c7.5,1.137) v1@7.818,0.818 ; 18.38,0.3 ccw(c18.38,-0.03) 18.147,0.203 cw(c18.38,-0.03) 18.38,0.3 ; 18.38,0.3 cw(c18.38,0.63) 18.147,0.397 ccw(c18.38,0.63) 18.38,0.3 ; 19,0.104 ccw(c19.404,0.507) 19.404,-0.064 cw(c19.404,0.507) 19,0.104 ; 19,0.104 cw(c18.597,-0.3) 19.168,-0.3 ccw(c18.597,-0.3) 19,0.104
  Solder Side w0.1: 8.5,0.5 10.5,0.5
  Solder Side w0.127: v1(8,1) 8.5,0.5 ; 10.5,0.5 11.5,0.5 13.5,0.5 13.7,0.3 P2-2.49@17.25,0.3 ; P2-2.49@17.2,0.3 P2-2.49@17.25,0.3 ; v1(19.404,-0.3) 18.804,0.3 P2-2.49@17.25,0.3 ; 8.404,0.596 ccw(c8,0.193) 8,0.764 cw(c8,0.193) 8.404,0.596 ; 8.404,0.596 cw(c8.808,1) 8.237,1 ccw(c8.808,1) 8.404,0.596 ; 16.12,0.3 ccw(c16.12,0.63) 16.353,0.397 cw(c16.12,0.63) 16.12,0.3 ; 16.12,0.3 cw(c16.12,-0.03) 16.353,0.203 ccw(c16.12,-0.03) 16.12,0.3 ; 18.38,0.3 ccw(c18.38,-0.03) 18.147,0.203 cw(c18.38,-0.03) 18.38,0.3 ; 18.38,0.3 cw(c18.38,0.63) 18.147,0.397 ccw(c18.38,0.63) 18.38,0.3 ; 19,0.104 ccw(c19.404,0.507) 19.404,-0.064 cw(c19.404,0.507) 19,0.104 ; 19,0.104 cw(c18.597,-0.3) 19.168,-0.3 ccw(c18.597,-0.3) 19,0.104
P2-51: P2-1.51 P2-2.51 U1.L17 | length 26
  Component Side w0.127: U1.L17@6.5,-0.5 v1(7,-1) ; P2-1.51@17.25,-0.3 v1(18.577,-0.3) v1@18.677,-0.3 ; U1.L17@6.596,-0.596 ccw(c7,-0.193) 7,-0.764 cw(c7,-0.193) U1.L17@6.596,-0.596 ; U1.L17@6.596,-0.596 cw(c6.193,-1) 6.764,-1 ccw(c6.193,-1) U1.L17@6.596,-0.596 ; v1@6.818,-0.818 ccw(c6.5,-1.137) 6.5,-0.686 cw(c6.5,-1.137) v1@6.818,-0.818 ; v1@6.818,-0.818 cw(c7.137,-0.5) 6.687,-0.5 ccw(c7.137,-0.5) v1@6.818,-0.818 ; P2-1.51@18.006,-0.3 ccw(c18.006,0.271) 18.41,-0.133 cw(c18.006,0.271) P2-1.51@18.006,-0.3 ; P2-1.51@18.006,-0.3 cw(c18.006,-0.871) 18.41,-0.467 ccw(c18.006,-0.871) P2-1.51@18.006,-0.3 ; v1@18.38,-0.3 ccw(c18.38,-0.63) 18.147,-0.397 cw(c18.38,-0.63) v1@18.38,-0.3 ; v1@18.38,-0.3 cw(c18.38,0.03) 18.147,-0.203 ccw(c18.38,0.03) v1@18.38,-0.3
  Solder Side w0.127: v1(7,-1) 8,0 10.5,0 11.5,0 13.4,0 13.7,-0.3 P2-2.51@17.25,-0.3 v1(18.577,-0.3) v1@18.677,-0.3 ; 7.404,-0.596 ccw(c7.808,-1) 7.237,-1 cw(c7.808,-1) 7.404,-0.596 ; 7.404,-0.596 cw(c7,-0.193) 7,-0.764 ccw(c7,-0.193) 7.404,-0.596 ; 16.12,-0.3 ccw(c16.12,0.03) 16.353,-0.203 cw(c16.12,0.03) 16.12,-0.3 ; 16.12,-0.3 cw(c16.12,-0.63) 16.353,-0.397 ccw(c16.12,-0.63) 16.12,-0.3 ; P2-2.51@18.006,-0.3 ccw(c18.006,0.271) 18.41,-0.133 cw(c18.006,0.271) P2-2.51@18.006,-0.3 ; P2-2.51@18.006,-0.3 cw(c18.006,-0.871) 18.41,-0.467 ccw(c18.006,-0.871) P2-2.51@18.006,-0.3 ; v1@18.38,-0.3 ccw(c18.38,-0.63) 18.147,-0.397 cw(c18.38,-0.63) v1@18.38,-0.3 ; v1@18.38,-0.3 cw(c18.38,0.03) 18.147,-0.203 ccw(c18.38,0.03) v1@18.38,-0.3
P2-53: P2-1.53 P2-2.53 U1.L18 | length 26.9
  Component Side w0.127: U1.L18@7.5,-0.5 v1(8,-1) ; P2-1.53@17.25,-0.9 18.804,-0.9 v1(19.404,-1.5) ; U1.L18@7.596,-0.596 ccw(c8,-0.193) 8,-0.764 cw(c8,-0.193) U1.L18@7.596,-0.596 ; U1.L18@7.596,-0.596 cw(c7.193,-1) 7.764,-1 ccw(c7.193,-1) U1.L18@7.596,-0.596 ; v1@7.818,-0.818 ccw(c7.5,-1.137) 7.5,-0.686 cw(c7.5,-1.137) v1@7.818,-0.818 ; v1@7.818,-0.818 cw(c8.137,-0.5) 7.687,-0.5 ccw(c8.137,-0.5) v1@7.818,-0.818 ; 18.38,-0.9 ccw(c18.38,-1.23) 18.147,-0.997 cw(c18.38,-1.23) 18.38,-0.9 ; 18.38,-0.9 cw(c18.38,-0.57) 18.147,-0.803 ccw(c18.38,-0.57) 18.38,-0.9 ; 19,-1.096 ccw(c19.404,-0.693) 19.404,-1.264 cw(c19.404,-0.693) 19,-1.096 ; 19,-1.096 cw(c18.597,-1.5) 19.168,-1.5 ccw(c18.597,-1.5) 19,-1.096
  Solder Side w0.1: 8.5,-0.5 10.385,-0.5 11.5,-0.5
  Solder Side w0.127: v1(8,-1) 8.5,-0.5 ; 11.5,-0.5 13.3,-0.5 13.7,-0.9 P2-2.53@17.25,-0.9 ; P2-2.53@17.2,-0.9 P2-2.53@17.25,-0.9 ; v1(19.404,-1.5) 18.804,-0.9 P2-2.53@17.25,-0.9 ; 8.404,-0.596 ccw(c8.808,-1) 8.237,-1 cw(c8.808,-1) 8.404,-0.596 ; 8.404,-0.596 cw(c8,-0.193) 8,-0.764 ccw(c8,-0.193) 8.404,-0.596 ; 16.12,-0.9 ccw(c16.12,-0.57) 16.353,-0.803 cw(c16.12,-0.57) 16.12,-0.9 ; 16.12,-0.9 cw(c16.12,-1.23) 16.353,-0.997 ccw(c16.12,-1.23) 16.12,-0.9 ; 18.38,-0.9 ccw(c18.38,-1.23) 18.147,-0.997 cw(c18.38,-1.23) 18.38,-0.9 ; 18.38,-0.9 cw(c18.38,-0.57) 18.147,-0.803 ccw(c18.38,-0.57) 18.38,-0.9 ; 19,-1.096 ccw(c19.404,-0.693) 19.404,-1.264 cw(c19.404,-0.693) 19,-1.096 ; 19,-1.096 cw(c18.597,-1.5) 19.168,-1.5 ccw(c18.597,-1.5) 19,-1.096
P2-55: P2-1.55 P2-2.55 U1.L19 | length 23.6
  Component Side w0.127: U1.L19@8.5,-0.5 v1(9,-1) ; P2-1.55@17.25,-1.5 v1(18.577,-1.5) v1@18.677,-1.5 ; U1.L19@8.596,-0.596 ccw(c9,-0.193) 9,-0.764 cw(c9,-0.193) U1.L19@8.596,-0.596 ; U1.L19@8.596,-0.596 cw(c8.193,-1) 8.764,-1 ccw(c8.193,-1) U1.L19@8.596,-0.596 ; v1@8.818,-0.818 ccw(c8.5,-1.137) 8.5,-0.686 cw(c8.5,-1.137) v1@8.818,-0.818 ; v1@8.818,-0.818 cw(c9.137,-0.5) 8.687,-0.5 ccw(c9.137,-0.5) v1@8.818,-0.818 ; P2-1.55@18.006,-1.5 ccw(c18.006,-0.929) 18.41,-1.333 cw(c18.006,-0.929) P2-1.55@18.006,-1.5 ; P2-1.55@18.006,-1.5 cw(c18.006,-2.071) 18.41,-1.667 ccw(c18.006,-2.071) P2-1.55@18.006,-1.5 ; v1@18.38,-1.5 ccw(c18.38,-1.83) 18.147,-1.597 cw(c18.38,-1.83) v1@18.38,-1.5 ; v1@18.38,-1.5 cw(c18.38,-1.17) 18.147,-1.403 ccw(c18.38,-1.17) v1@18.38,-1.5
  Solder Side w0.1: 9.5,-1.5 10.385,-1.5 11.5,-1.5
  Solder Side w0.127: v1(9,-1) 9.5,-1.5 ; 11.5,-1.5 P2-2.55@17.15,-1.5 ; P2-2.55@17.25,-1.5 v1(18.577,-1.5) v1@18.677,-1.5 ; 9.404,-1.404 ccw(c9,-1.807) 9,-1.237 cw(c9,-1.807) 9.404,-1.404 ; 9.404,-1.404 cw(c9.808,-1) 9.237,-1 ccw(c9.808,-1) 9.404,-1.404 ; 16.12,-1.5 ccw(c16.12,-1.17) 16.353,-1.403 cw(c16.12,-1.17) 16.12,-1.5 ; 16.12,-1.5 cw(c16.12,-1.83) 16.353,-1.597 ccw(c16.12,-1.83) 16.12,-1.5 ; P2-2.55@18.006,-1.5 ccw(c18.006,-0.929) 18.41,-1.333 cw(c18.006,-0.929) P2-2.55@18.006,-1.5 ; P2-2.55@18.006,-1.5 cw(c18.006,-2.071) 18.41,-1.667 ccw(c18.006,-2.071) P2-2.55@18.006,-1.5 ; v1@18.38,-1.5 ccw(c18.38,-1.83) 18.147,-1.597 cw(c18.38,-1.83) v1@18.38,-1.5 ; v1@18.38,-1.5 cw(c18.38,-1.17) 18.147,-1.403 ccw(c18.38,-1.17) v1@18.38,-1.5
P2-57: P2-1.57 P2-2.57 U1.M20 | length 23.6
  Component Side w0.127: U1.M20@9.5,-1.5 v1(10,-2) ; P2-1.57@17.25,-2.1 18.804,-2.1 v1(19.404,-2.7) ; U1.M20@9.596,-1.596 ccw(c10,-1.193) 10,-1.764 cw(c10,-1.193) U1.M20@9.596,-1.596 ; U1.M20@9.596,-1.596 cw(c9.193,-2) 9.764,-2 ccw(c9.193,-2) U1.M20@9.596,-1.596 ; v1@9.818,-1.818 ccw(c9.5,-2.137) 9.5,-1.686 cw(c9.5,-2.137) v1@9.818,-1.818 ; v1@9.818,-1.818 cw(c10.137,-1.5) 9.687,-1.5 ccw(c10.137,-1.5) v1@9.818,-1.818 ; 18.38,-2.1 ccw(c18.38,-2.43) 18.147,-2.197 cw(c18.38,-2.43) 18.38,-2.1 ; 18.38,-2.1 cw(c18.38,-1.77) 18.147,-2.003 ccw(c18.38,-1.77) 18.38,-2.1 ; 19,-2.296 ccw(c19.404,-1.893) 19.404,-2.464 cw(c19.404,-1.893) 19,-2.296 ; 19,-2.296 cw(c18.597,-2.7) 19.168,-2.7 ccw(c18.597,-2.7) 19,-2.296
  Solder Side w0.127: v1(10,-2) 10.385,-2 ; v1(19.404,-2.7) 18.804,-2.1 P2-2.57@17.25,-2.1 13.7,-2.1 13.6,-2 11.5,-2 10.385,-2 ; 10.385,-2 ccw(c10.385,-2.195) 10.211,-2.107 cw(c10.385,-2.195) 10.385,-2 ; 10.385,-2 cw(c10.385,-1.805) 10.211,-1.893 ccw(c10.385,-1.805) 10.385,-2 ; 16.12,-2.1 ccw(c16.12,-1.77) 16.353,-2.003 cw(c16.12,-1.77) 16.12,-2.1 ; 16.12,-2.1 cw(c16.12,-2.43) 16.353,-2.197 ccw(c16.12,-2.43) 16.12,-2.1 ; 18.38,-2.1 ccw(c18.38,-2.43) 18.147,-2.197 cw(c18.38,-2.43) 18.38,-2.1 ; 18.38,-2.1 cw(c18.38,-1.77) 18.147,-2.003 ccw(c18.38,-1.77) 18.38,-2.1 ; 19,-2.296 ccw(c19.404,-1.893) 19.404,-2.464 cw(c19.404,-1.893) 19,-2.296 ; 19,-2.296 cw(c18.597,-2.7) 19.168,-2.7 ccw(c18.597,-2.7) 19,-2.296
P2-59: P2-1.59 P2-2.59 U1.M19 | length 23.8
  Component Side w0.127: U1.M19@8.5,-1.5 v1(9,-2) ; P2-1.59@17.25,-2.7 v1(18.577,-2.7) v1@18.677,-2.7 ; U1.M19@8.596,-1.596 ccw(c9,-1.193) 9,-1.764 cw(c9,-1.193) U1.M19@8.596,-1.596 ; U1.M19@8.596,-1.596 cw(c8.193,-2) 8.764,-2 ccw(c8.193,-2) U1.M19@8.596,-1.596 ; v1@8.818,-1.818 ccw(c8.5,-2.137) 8.5,-1.686 cw(c8.5,-2.137) v1@8.818,-1.818 ; v1@8.818,-1.818 cw(c9.137,-1.5) 8.687,-1.5 ccw(c9.137,-1.5) v1@8.818,-1.818 ; P2-1.59@18.006,-2.7 ccw(c18.006,-2.129) 18.41,-2.533 cw(c18.006,-2.129) P2-1.59@18.006,-2.7 ; P2-1.59@18.006,-2.7 cw(c18.006,-3.271) 18.41,-2.867 ccw(c18.006,-3.271) P2-1.59@18.006,-2.7 ; v1@18.38,-2.7 ccw(c18.38,-3.03) 18.147,-2.797 cw(c18.38,-3.03) v1@18.38,-2.7 ; v1@18.38,-2.7 cw(c18.38,-2.37) 18.147,-2.603 ccw(c18.38,-2.37) v1@18.38,-2.7
  Solder Side w0.1: 9.5,-2.5 10.385,-2.5 11.5,-2.5
  Solder Side w0.127: v1(9,-2) 9.5,-2.5 ; 11.5,-2.5 13.5,-2.5 13.7,-2.7 P2-2.59@17.25,-2.7 v1(18.577,-2.7) v1@18.677,-2.7 ; 9.404,-2.404 ccw(c9,-2.807) 9,-2.237 cw(c9,-2.807) 9.404,-2.404 ; 9.404,-2.404 cw(c9.808,-2) 9.237,-2 ccw(c9.808,-2) 9.404,-2.404 ; 16.12,-2.7 ccw(c16.12,-2.37) 16.353,-2.603 cw(c16.12,-2.37) 16.12,-2.7 ; 16.12,-2.7 cw(c16.12,-3.03) 16.353,-2.797 ccw(c16.12,-3.03) 16.12,-2.7 ; P2-2.59@18.006,-2.7 ccw(c18.006,-2.129) 18.41,-2.533 cw(c18.006,-2.129) P2-2.59@18.006,-2.7 ; P2-2.59@18.006,-2.7 cw(c18.006,-3.271) 18.41,-2.867 ccw(c18.006,-3.271) P2-2.59@18.006,-2.7 ; v1@18.38,-2.7 ccw(c18.38,-3.03) 18.147,-2.797 cw(c18.38,-3.03) v1@18.38,-2.7 ; v1@18.38,-2.7 cw(c18.38,-2.37) 18.147,-2.603 ccw(c18.38,-2.37) v1@18.38,-2.7
P2-61: P2-1.61 P2-2.61 U1.N19 | length 25.8
  Component Side w0.127: U1.N19@8.5,-2.5 v1(9,-3) ; P2-1.61@17.25,-3.3 18.804,-3.3 v1(19.404,-3.9) ; U1.N19@8.596,-2.596 ccw(c9,-2.193) 9,-2.764 cw(c9,-2.193) U1.N19@8.596,-2.596 ; U1.N19@8.596,-2.596 cw(c8.193,-3) 8.764,-3 ccw(c8.193,-3) U1.N19@8.596,-2.596 ; v1@8.818,-2.818 ccw(c8.5,-3.137) 8.5,-2.686 cw(c8.5,-3.137) v1@8.818,-2.818 ; v1@8.818,-2.818 cw(c9.137,-2.5) 8.687,-2.5 ccw(c9.137,-2.5) v1@8.818,-2.818 ; 18.38,-3.3 ccw(c18.38,-3.63) 18.147,-3.397 cw(c18.38,-3.63) 18.38,-3.3 ; 18.38,-3.3 cw(c18.38,-2.97) 18.147,-3.203 ccw(c18.38,-2.97) 18.38,-3.3 ; 19,-3.496 ccw(c19.404,-3.093) 19.404,-3.664 cw(c19.404,-3.093) 19,-3.496 ; 19,-3.496 cw(c18.597,-3.9) 19.168,-3.9 ccw(c18.597,-3.9) 19,-3.496
  Solder Side w0.1: 9.5,-3.5 10.385,-3.5 11.5,-3.5
  Solder Side w0.127: v1(9,-3) 9.5,-3.5 ; 11.5,-3.5 13.5,-3.5 13.7,-3.3 P2-2.61@17.25,-3.3 ; P2-2.61@17.2,-3.3 P2-2.61@17.25,-3.3 ; v1(19.404,-3.9) 18.804,-3.3 P2-2.61@17.25,-3.3 ; 9.404,-3.404 ccw(c9,-3.807) 9,-3.237 cw(c9,-3.807) 9.404,-3.404 ; 9.404,-3.404 cw(c9.808,-3) 9.237,-3 ccw(c9.808,-3) 9.404,-3.404 ; 16.12,-3.3 ccw(c16.12,-2.97) 16.353,-3.203 cw(c16.12,-2.97) 16.12,-3.3 ; 16.12,-3.3 cw(c16.12,-3.63) 16.353,-3.397 ccw(c16.12,-3.63) 16.12,-3.3 ; 18.38,-3.3 ccw(c18.38,-3.63) 18.147,-3.397 cw(c18.38,-3.63) 18.38,-3.3 ; 18.38,-3.3 cw(c18.38,-2.97) 18.147,-3.203 ccw(c18.38,-2.97) 18.38,-3.3 ; 19,-3.496 ccw(c19.404,-3.093) 19.404,-3.664 cw(c19.404,-3.093) 19,-3.496 ; 19,-3.496 cw(c18.597,-3.9) 19.168,-3.9 ccw(c18.597,-3.9) 19,-3.496
P2-63: P2-1.63 P2-2.63 U1.P20 | length 22.2
  Component Side w0.127: U1.P20@9.5,-3.5 v1(10,-4) ; P2-1.63@17.25,-3.9 v1(18.577,-3.9) v1@18.677,-3.9 ; U1.P20@9.596,-3.596 ccw(c10,-3.193) 10,-3.764 cw(c10,-3.193) U1.P20@9.596,-3.596 ; U1.P20@9.596,-3.596 cw(c9.193,-4) 9.764,-4 ccw(c9.193,-4) U1.P20@9.596,-3.596 ; v1@9.818,-3.818 ccw(c9.5,-4.137) 9.5,-3.686 cw(c9.5,-4.137) v1@9.818,-3.818 ; v1@9.818,-3.818 cw(c10.137,-3.5) 9.687,-3.5 ccw(c10.137,-3.5) v1@9.818,-3.818 ; P2-1.63@18.006,-3.9 ccw(c18.006,-3.329) 18.41,-3.733 cw(c18.006,-3.329) P2-1.63@18.006,-3.9 ; P2-1.63@18.006,-3.9 cw(c18.006,-4.471) 18.41,-4.067 ccw(c18.006,-4.471) P2-1.63@18.006,-3.9 ; v1@18.38,-3.9 ccw(c18.38,-4.23) 18.147,-3.997 cw(c18.38,-4.23) v1@18.38,-3.9 ; v1@18.38,-3.9 cw(c18.38,-3.57) 18.147,-3.803 ccw(c18.38,-3.57) v1@18.38,-3.9
  Solder Side w0.127: v1(10,-4) 10.385,-4 ; P2-2.63@17.25,-4 11.5,-4 10.385,-4 ; P2-2.63@17.25,-3.9 v1(18.577,-3.9) v1@18.677,-3.9 ; 10.385,-4 ccw(c10.385,-4.195) 10.211,-4.107 cw(c10.385,-4.195) 10.385,-4 ; 10.385,-4 cw(c10.385,-3.805) 10.211,-3.893 ccw(c10.385,-3.805) 10.385,-4 ; P2-2.63@18.006,-3.9 ccw(c18.006,-3.329) 18.41,-3.733 cw(c18.006,-3.329) P2-2.63@18.006,-3.9 ; P2-2.63@18.006,-3.9 cw(c18.006,-4.471) 18.41,-4.067 ccw(c18.006,-4.471) P2-2.63@18.006,-3.9 ; v1@18.38,-3.9 ccw(c18.38,-4.23) 18.147,-3.997 cw(c18.38,-4.23) v1@18.38,-3.9 ; v1@18.38,-3.9 cw(c18.38,-3.57) 18.147,-3.803 ccw(c18.38,-3.57) v1@18.38,-3.9 ; 15.879,-4 ccw(c15.879,-3.329) 16.353,-3.803 cw(c15.879,-3.329) 15.879,-4 ; 16.186,-4 ccw(c16.186,-3.636) 16.443,-3.893 cw(c16.186,-3.636) 16.186,-4
P2-65: P2-1.65 P2-2.65 U1.R20 | length 23.7
  Component Side w0.127: U1.R20@9.5,-4.5 v1(10,-5) ; P2-1.65@17.25,-4.5 18.804,-4.5 v1(19.404,-5.1) ; U1.R20@9.596,-4.596 ccw(c10,-4.193) 10,-4.764 cw(c10,-4.193) U1.R20@9.596,-4.596 ; U1.R20@9.596,-4.596 cw(c9.193,-5) 9.764,-5 ccw(c9.193,-5) U1.R20@9.596,-4.596 ; v1@9.818,-4.818 ccw(c9.5,-5.137) 9.5,-4.686 cw(c9.5,-5.137) v1@9.818,-4.818 ; v1@9.818,-4.818 cw(c10.137,-4.5) 9.687,-4.5 ccw(c10.137,-4.5) v1@9.818,-4.818 ; 18.38,-4.5 ccw(c18.38,-4.83) 18.147,-4.597 cw(c18.38,-4.83) 18.38,-4.5 ; 18.38,-4.5 cw(c18.38,-4.17) 18.147,-4.403 ccw(c18.38,-4.17) 18.38,-4.5 ; 19,-4.696 ccw(c19.404,-4.293) 19.404,-4.864 cw(c19.404,-4.293) 19,-4.696 ; 19,-4.696 cw(c18.597,-5.1) 19.168,-5.1 ccw(c18.597,-5.1) 19,-4.696
  Solder Side w0.127: v1(10,-5) 10.385,-5 ; v1(19.404,-5.1) 18.804,-4.5 P2-2.65@17.25,-4.5 13.7,-4.5 13.2,-5 11.5,-5 10.385,-5 ; 10.385,-5 ccw(c10.385,-5.195) 10.211,-5.107 cw(c10.385,-5.195) 10.385,-5 ; 10.385,-5 cw(c10.385,-4.805) 10.211,-4.893 ccw(c10.385,-4.805) 10.385,-5 ; 16.12,-4.5 ccw(c16.12,-4.17) 16.353,-4.403 cw(c16.12,-4.17) 16.12,-4.5 ; 16.12,-4.5 cw(c16.12,-4.83) 16.353,-4.597 ccw(c16.12,-4.83) 16.12,-4.5 ; 18.38,-4.5 ccw(c18.38,-4.83) 18.147,-4.597 cw(c18.38,-4.83) 18.38,-4.5 ; 18.38,-4.5 cw(c18.38,-4.17) 18.147,-4.403 ccw(c18.38,-4.17) 18.38,-4.5 ; 19,-4.696 ccw(c19.404,-4.293) 19.404,-4.864 cw(c19.404,-4.293) 19,-4.696 ; 19,-4.696 cw(c18.597,-5.1) 19.168,-5.1 ccw(c18.597,-5.1) 19,-4.696
P2-67: P2-1.67 P2-2.67 U1.R19 | length 23.9
  Component Side w0.127: U1.R19@8.5,-4.5 v1(9,-5) ; P2-1.67@17.25,-5.1 v1(18.577,-5.1) v1@18.677,-5.1 ; U1.R19@8.596,-4.596 ccw(c9,-4.193) 9,-4.764 cw(c9,-4.193) U1.R19@8.596,-4.596 ; U1.R19@8.596,-4.596 cw(c8.193,-5) 8.764,-5 ccw(c8.193,-5) U1.R19@8.596,-4.596 ; v1@8.818,-4.818 ccw(c8.5,-5.137) 8.5,-4.686 cw(c8.5,-5.137) v1@8.818,-4.818 ; v1@8.818,-4.818 cw(c9.137,-4.5) 8.687,-4.5 ccw(c9.137,-4.5) v1@8.818,-4.818 ; P2-1.67@18.006,-5.1 ccw(c18.006,-4.529) 18.41,-4.933 cw(c18.006,-4.529) P2-1.67@18.006,-5.1 ; P2-1.67@18.006,-5.1 cw(c18.006,-5.671) 18.41,-5.267 ccw(c18.006,-5.671) P2-1.67@18.006,-5.1 ; v1@18.38,-5.1 ccw(c18.38,-5.43) 18.147,-5.197 cw(c18.38,-5.43) v1@18.38,-5.1 ; v1@18.38,-5.1 cw(c18.38,-4.77) 18.147,-5.003 ccw(c18.38,-4.77) v1@18.38,-5.1
  Solder Side w0.1: 9.5,-5.5 10.385,-5.5 11.5,-5.5
  Solder Side w0.127: v1(9,-5) 9.5,-5.5 ; 11.5,-5.5 13.3,-5.5 13.7,-5.1 P2-2.67@17.25,-5.1 v1(18.577,-5.1) v1@18.677,-5.1 ; 9.404,-5.404 ccw(c9,-5.807) 9,-5.237 cw(c9,-5.807) 9.404,-5.404 ; 9.404,-5.404 cw(c9.808,-5) 9.237,-5 ccw(c9.808,-5) 9.404,-5.404 ; 16.12,-5.1 ccw(c16.12,-4.77) 16.353,-5.003 cw(c16.12,-4.77) 16.12,-5.1 ; 16.12,-5.1 cw(c16.12,-5.43) 16.353,-5.197 ccw(c16.12,-5.43) 16.12,-5.1 ; P2-2.67@18.006,-5.1 ccw(c18.006,-4.529) 18.41,-4.933 cw(c18.006,-4.529) P2-2.67@18.006,-5.1 ; P2-2.67@18.006,-5.1 cw(c18.006,-5.671) 18.41,-5.267 ccw(c18.006,-5.671) P2-2.67@18.006,-5.1 ; v1@18.38,-5.1 ccw(c18.38,-5.43) 18.147,-5.197 cw(c18.38,-5.43) v1@18.38,-5.1 ; v1@18.38,-5.1 cw(c18.38,-4.77) 18.147,-5.003 ccw(c18.38,-4.77) v1@18.38,-5.1
P2-69: P2-1.69 P2-2.69 U1.T20 | length 23.6
  Component Side w0.127: U1.T20@9.5,-5.5 v1(10,-6) ; P2-1.69@17.25,-5.7 18.804,-5.7 v1(19.404,-6.3) ; U1.T20@9.596,-5.596 ccw(c10,-5.193) 10,-5.764 cw(c10,-5.193) U1.T20@9.596,-5.596 ; U1.T20@9.596,-5.596 cw(c9.193,-6) 9.764,-6 ccw(c9.193,-6) U1.T20@9.596,-5.596 ; v1@9.818,-5.818 ccw(c9.5,-6.137) 9.5,-5.686 cw(c9.5,-6.137) v1@9.818,-5.818 ; v1@9.818,-5.818 cw(c10.137,-5.5) 9.687,-5.5 ccw(c10.137,-5.5) v1@9.818,-5.818 ; 18.38,-5.7 ccw(c18.38,-6.03) 18.147,-5.797 cw(c18.38,-6.03) 18.38,-5.7 ; 18.38,-5.7 cw(c18.38,-5.37) 18.147,-5.603 ccw(c18.38,-5.37) 18.38,-5.7 ; 19,-5.896 ccw(c19.404,-5.493) 19.404,-6.064 cw(c19.404,-5.493) 19,-5.896 ; 19,-5.896 cw(c18.597,-6.3) 19.168,-6.3 ccw(c18.597,-6.3) 19,-5.896
  Solder Side w0.127: v1(10,-6) 10.385,-6 ; v1(19.404,-6.3) 18.804,-5.7 P2-2.69@17.25,-5.7 13.7,-5.7 13.4,-6 11.5,-6 10.385,-6 ; 10.385,-6 ccw(c10.385,-6.195) 10.211,-6.107 cw(c10.385,-6.195) 10.385,-6 ; 10.385,-6 cw(c10.385,-5.805) 10.211,-5.893 ccw(c10.385,-5.805) 10.385,-6 ; 16.12,-5.7 ccw(c16.12,-5.37) 16.353,-5.603 cw(c16.12,-5.37) 16.12,-5.7 ; 16.12,-5.7 cw(c16.12,-6.03) 16.353,-5.797 ccw(c16.12,-6.03) 16.12,-5.7 ; 18.38,-5.7 ccw(c18.38,-6.03) 18.147,-5.797 cw(c18.38,-6.03) 18.38,-5.7 ; 18.38,-5.7 cw(c18.38,-5.37) 18.147,-5.603 ccw(c18.38,-5.37) 18.38,-5.7 ; 19,-5.896 ccw(c19.404,-5.493) 19.404,-6.064 cw(c19.404,-5.493) 19,-5.896 ; 19,-5.896 cw(c18.597,-6.3) 19.168,-6.3 ccw(c18.597,-6.3) 19,-5.896
P2-71: P2-1.71 P2-2.71 U1.T18 | length 24.8
  Component Side w0.127: U1.T18@7.5,-5.5 v1(8,-6) ; P2-1.71@17.25,-6.3 v1(18.577,-6.3) v1@18.677,-6.3 ; U1.T18@7.596,-5.596 ccw(c8,-5.193) 8,-5.764 cw(c8,-5.193) U1.T18@7.596,-5.596 ; U1.T18@7.596,-5.596 cw(c7.193,-6) 7.764,-6 ccw(c7.193,-6) U1.T18@7.596,-5.596 ; v1@7.818,-5.818 ccw(c7.5,-6.137) 7.5,-5.686 cw(c7.5,-6.137) v1@7.818,-5.818 ; v1@7.818,-5.818 cw(c8.137,-5.5) 7.687,-5.5 ccw(c8.137,-5.5) v1@7.818,-5.818 ; P2-1.71@18.006,-6.3 ccw(c18.006,-5.729) 18.41,-6.133 cw(c18.006,-5.729) P2-1.71@18.006,-6.3 ; P2-1.71@18.006,-6.3 cw(c18.006,-6.871) 18.41,-6.467 ccw(c18.006,-6.871) P2-1.71@18.006,-6.3 ; v1@18.38,-6.3 ccw(c18.38,-6.63) 18.147,-6.397 cw(c18.38,-6.63) v1@18.38,-6.3 ; v1@18.38,-6.3 cw(c18.38,-5.97) 18.147,-6.203 ccw(c18.38,-5.97) v1@18.38,-6.3
  Solder Side w0.1: 8.5,-6.5 10.385,-6.5 11.5,-6.5
  Solder Side w0.127: v1(8,-6) 8.5,-6.5 ; 11.5,-6.5 13.5,-6.5 13.7,-6.3 P2-2.71@17.25,-6.3 v1(18.577,-6.3) v1@18.677,-6.3 ; 8.404,-6.404 ccw(c8,-6.807) 8,-6.237 cw(c8,-6.807) 8.404,-6.404 ; 8.404,-6.404 cw(c8.808,-6) 8.237,-6 ccw(c8.808,-6) 8.404,-6.404 ; 16.12,-6.3 ccw(c16.12,-5.97) 16.353,-6.203 cw(c16.12,-5.97) 16.12,-6.3 ; 16.12,-6.3 cw(c16.12,-6.63) 16.353,-6.397 ccw(c16.12,-6.63) 16.12,-6.3 ; P2-2.71@18.006,-6.3 ccw(c18.006,-5.729) 18.41,-6.133 cw(c18.006,-5.729) P2-2.71@18.006,-6.3 ; P2-2.71@18.006,-6.3 cw(c18.006,-6.871) 18.41,-6.467 ccw(c18.006,-6.871) P2-2.71@18.006,-6.3 ; v1@18.38,-6.3 ccw(c18.38,-6.63) 18.147,-6.397 cw(c18.38,-6.63) v1@18.38,-6.3 ; v1@18.38,-6.3 cw(c18.38,-5.97) 18.147,-6.203 ccw(c18.38,-5.97) v1@18.38,-6.3
P2-73: P2-1.73 P2-2.73 U1.U20 | length 24.2
  Component Side w0.127: U1.U20@9.5,-6.5 v1(10,-7) ; P2-1.73@17.25,-6.9 18.804,-6.9 v1(19.404,-7.5) ; U1.U20@9.596,-6.596 ccw(c10,-6.193) 10,-6.764 cw(c10,-6.193) U1.U20@9.596,-6.596 ; U1.U20@9.596,-6.596 cw(c9.193,-7) 9.764,-7 ccw(c9.193,-7) U1.U20@9.596,-6.596 ; v1@9.818,-6.818 ccw(c9.5,-7.137) 9.5,-6.686 cw(c9.5,-7.137) v1@9.818,-6.818 ; v1@9.818,-6.818 cw(c10.137,-6.5) 9.687,-6.5 ccw(c10.137,-6.5) v1@9.818,-6.818 ; 18.38,-6.9 ccw(c18.38,-7.23) 18.147,-6.997 cw(c18.38,-7.23) 18.38,-6.9 ; 18.38,-6.9 cw(c18.38,-6.57) 18.147,-6.803 ccw(c18.38,-6.57) 18.38,-6.9 ; 19,-7.096 ccw(c19.404,-6.693) 19.404,-7.264 cw(c19.404,-6.693) 19,-7.096 ; 19,-7.096 cw(c18.597,-7.5) 19.168,-7.5 ccw(c18.597,-7.5) 19,-7.096
  Solder Side w0.127: v1(10,-7) 10.385,-7 ; P2-2.73@17.2,-6.9 P2-2.73@17.25,-6.9 18.804,-6.9 v1(19.404,-7.5) ; P2-2.73@17.25,-7 11.5,-7 10.385,-7 ; 10.385,-7 ccw(c10.385,-7.195) 10.211,-7.107 cw(c10.385,-7.195) 10.385,-7 ; 10.385,-7 cw(c10.385,-6.805) 10.211,-6.893 ccw(c10.385,-6.805) 10.385,-7 ; 18.38,-6.9 ccw(c18.38,-7.23) 18.147,-6.997 cw(c18.38,-7.23) 18.38,-6.9 ; 18.38,-6.9 cw(c18.38,-6.57) 18.147,-6.803 ccw(c18.38,-6.57) 18.38,-6.9 ; 19,-7.096 ccw(c19.404,-6.693) 19.404,-7.264 cw(c19.404,-6.693) 19,-7.096 ; 19,-7.096 cw(c18.597,-7.5) 19.168,-7.5 ccw(c18.597,-7.5) 19,-7.096 ; 15.879,-7 ccw(c15.879,-6.329) 16.353,-6.803 cw(c15.879,-6.329) 15.879,-7 ; 16.186,-7 ccw(c16.186,-6.636) 16.443,-6.893 cw(c16.186,-6.636) 16.186,-7
P2-75: P2-1.75 P2-2.75 U1.U19 | length 23.7
  Component Side w0.127: U1.U19@8.5,-6.5 v1(9,-7) ; P2-1.75@17.25,-7.5 v1(18.577,-7.5) v1@18.677,-7.5 ; U1.U19@8.596,-6.596 ccw(c9,-6.193) 9,-6.764 cw(c9,-6.193) U1.U19@8.596,-6.596 ; U1.U19@8.596,-6.596 cw(c8.193,-7) 8.764,-7 ccw(c8.193,-7) U1.U19@8.596,-6.596 ; v1@8.818,-6.818 ccw(c8.5,-7.137) 8.5,-6.686 cw(c8.5,-7.137) v1@8.818,-6.818 ; v1@8.818,-6.818 cw(c9.137,-6.5) 8.687,-6.5 ccw(c9.137,-6.5) v1@8.818,-6.818 ; P2-1.75@18.006,-7.5 ccw(c18.006,-6.929) 18.41,-7.333 cw(c18.006,-6.929) P2-1.75@18.006,-7.5 ; P2-1.75@18.006,-7.5 cw(c18.006,-8.071) 18.41,-7.667 ccw(c18.006,-8.071) P2-1.75@18.006,-7.5 ; v1@18.38,-7.5 ccw(c18.38,-7.83) 18.147,-7.597 cw(c18.38,-7.83) v1@18.38,-7.5 ; v1@18.38,-7.5 cw(c18.38,-7.17) 18.147,-7.403 ccw(c18.38,-7.17) v1@18.38,-7.5
  Solder Side w0.1: 9.5,-7.5 10.385,-7.5 11.5,-7.5
  Solder Side w0.127: v1(9,-7) 9.5,-7.5 ; 11.5,-7.5 P2-2.75@17.25,-7.5 v1(18.577,-7.5) v1@18.677,-7.5 ; 9.404,-7.404 ccw(c9,-7.807) 9,-7.237 cw(c9,-7.807) 9.404,-7.404 ; 9.404,-7.404 cw(c9.808,-7) 9.237,-7 ccw(c9.808,-7) 9.404,-7.404 ; 16.12,-7.5 ccw(c16.12,-7.17) 16.353,-7.403 cw(c16.12,-7.17) 16.12,-7.5 ; 16.12,-7.5 cw(c16.12,-7.83) 16.353,-7.597 ccw(c16.12,-7.83) 16.12,-7.5 ; P2-2.75@18.006,-7.5 ccw(c18.006,-6.929) 18.41,-7.333 cw(c18.006,-6.929) P2-2.75@18.006,-7.5 ; P2-2.75@18.006,-7.5 cw(c18.006,-8.071) 18.41,-7.667 ccw(c18.006,-8.071) P2-2.75@18.006,-7.5 ; v1@18.38,-7.5 ccw(c18.38,-7.83) 18.147,-7.597 cw(c18.38,-7.83) v1@18.38,-7.5 ; v1@18.38,-7.5 cw(c18.38,-7.17) 18.147,-7.403 ccw(c18.38,-7.17) v1@18.38,-7.5
P2-77: P2-1.77 P2-2.77 U1.V20 | length 23.6
  Component Side w0.127: U1.V20@9.5,-7.5 v1(10,-8) ; P2-1.77@17.25,-8.1 18.804,-8.1 v1(19.404,-8.7) ; U1.V20@9.596,-7.596 ccw(c10,-7.193) 10,-7.764 cw(c10,-7.193) U1.V20@9.596,-7.596 ; U1.V20@9.596,-7.596 cw(c9.193,-8) 9.764,-8 ccw(c9.193,-8) U1.V20@9.596,-7.596 ; v1@9.818,-7.818 ccw(c9.5,-8.137) 9.5,-7.686 cw(c9.5,-8.137) v1@9.818,-7.818 ; v1@9.818,-7.818 cw(c10.137,-7.5) 9.687,-7.5 ccw(c10.137,-7.5) v1@9.818,-7.818 ; 18.38,-8.1 ccw(c18.38,-8.43) 18.147,-8.197 cw(c18.38,-8.43) 18.38,-8.1 ; 18.38,-8.1 cw(c18.38,-7.77) 18.147,-8.003 ccw(c18.38,-7.77) 18.38,-8.1 ; 19,-8.296 ccw(c19.404,-7.893) 19.404,-8.464 cw(c19.404,-7.893) 19,-8.296 ; 19,-8.296 cw(c18.597,-8.7) 19.168,-8.7 ccw(c18.597,-8.7) 19,-8.296
  Solder Side w0.127: v1(10,-8) 10.385,-8 ; P2-2.77@17.2,-8.1 P2-2.77@17.25,-8.1 ; v1(19.404,-8.7) 18.804,-8.1 P2-2.77@17.25,-8.1 ; 10.385,-8 ccw(c10.385,-8.195) 10.211,-8.107 cw(c10.385,-8.195) 10.385,-8 ; 10.385,-8 cw(c10.385,-7.805) 10.211,-7.893 ccw(c10.385,-7.805) 10.385,-8 ; 10.385,-8 11.5,-8 13.6,-8 13.7,-8.1 P2-2.77@17.25,-8.1 ; 16.12,-8.1 ccw(c16.12,-7.77) 16.353,-8.003 cw(c16.12,-7.77) 16.12,-8.1 ; 16.12,-8.1 cw(c16.12,-8.43) 16.353,-8.197 ccw(c16.12,-8.43) 16.12,-8.1 ; 18.38,-8.1 ccw(c18.38,-8.43) 18.147,-8.197 cw(c18.38,-8.43) 18.38,-8.1 ; 18.38,-8.1 cw(c18.38,-7.77) 18.147,-8.003 ccw(c18.38,-7.77) 18.38,-8.1 ; 19,-8.296 ccw(c19.404,-7.893) 19.404,-8.464 cw(c19.404,-7.893) 19,-8.296 ; 19,-8.296 cw(c18.597,-8.7) 19.168,-8.7 ccw(c18.597,-8.7) 19,-8.296
P2-79: P2-1.79 P2-2.79 U1.V19 | length 23.8
  Component Side w0.127: U1.V19@8.5,-7.5 v1(9,-8) ; P2-1.79@17.25,-8.7 v1(18.577,-8.7) v1@18.677,-8.7 ; U1.V19@8.596,-7.596 ccw(c9,-7.193) 9,-7.764 cw(c9,-7.193) U1.V19@8.596,-7.596 ; U1.V19@8.596,-7.596 cw(c8.193,-8) 8.764,-8 ccw(c8.193,-8) U1.V19@8.596,-7.596 ; v1@8.818,-7.818 ccw(c8.5,-8.137) 8.5,-7.686 cw(c8.5,-8.137) v1@8.818,-7.818 ; v1@8.818,-7.818 cw(c9.137,-7.5) 8.687,-7.5 ccw(c9.137,-7.5) v1@8.818,-7.818 ; P2-1.79@18.006,-8.7 ccw(c18.006,-8.129) 18.41,-8.533 cw(c18.006,-8.129) P2-1.79@18.006,-8.7 ; P2-1.79@18.006,-8.7 cw(c18.006,-9.271) 18.41,-8.867 ccw(c18.006,-9.271) P2-1.79@18.006,-8.7 ; v1@18.38,-8.7 ccw(c18.38,-9.03) 18.147,-8.797 cw(c18.38,-9.03) v1@18.38,-8.7 ; v1@18.38,-8.7 cw(c18.38,-8.37) 18.147,-8.603 ccw(c18.38,-8.37) v1@18.38,-8.7
  Solder Side w0.1: 9.5,-8.5 10.385,-8.5 11.5,-8.5
  Solder Side w0.127: v1(9,-8) 9.5,-8.5 ; 11.5,-8.5 13.5,-8.5 13.7,-8.7 P2-2.79@17.25,-8.7 v1(18.577,-8.7) v1@18.677,-8.7 ; 9.404,-8.404 ccw(c9,-8.807) 9,-8.237 cw(c9,-8.807) 9.404,-8.404 ; 9.404,-8.404 cw(c9.808,-8) 9.237,-8 ccw(c9.808,-8) 9.404,-8.404 ; 16.12,-8.7 ccw(c16.12,-8.37) 16.353,-8.603 cw(c16.12,-8.37) 16.12,-8.7 ; 16.12,-8.7 cw(c16.12,-9.03) 16.353,-8.797 ccw(c16.12,-9.03) 16.12,-8.7 ; P2-2.79@18.006,-8.7 ccw(c18.006,-8.129) 18.41,-8.533 cw(c18.006,-8.129) P2-2.79@18.006,-8.7 ; P2-2.79@18.006,-8.7 cw(c18.006,-9.271) 18.41,-8.867 ccw(c18.006,-9.271) P2-2.79@18.006,-8.7 ; v1@18.38,-8.7 ccw(c18.38,-9.03) 18.147,-8.797 cw(c18.38,-9.03) v1@18.38,-8.7 ; v1@18.38,-8.7 cw(c18.38,-8.37) 18.147,-8.603 ccw(c18.38,-8.37) v1@18.38,-8.7